# Altium PCB XL6019.PcbDoc
Units mil, origin at the board's own origin, x right, y up, seen from the top; angles counter-clockwise.
Board outline 1400 x 720 mil, 2 copper layers (Top Layer, Bottom Layer); 13 components, 5 nets, 26 pads, 99 vias.
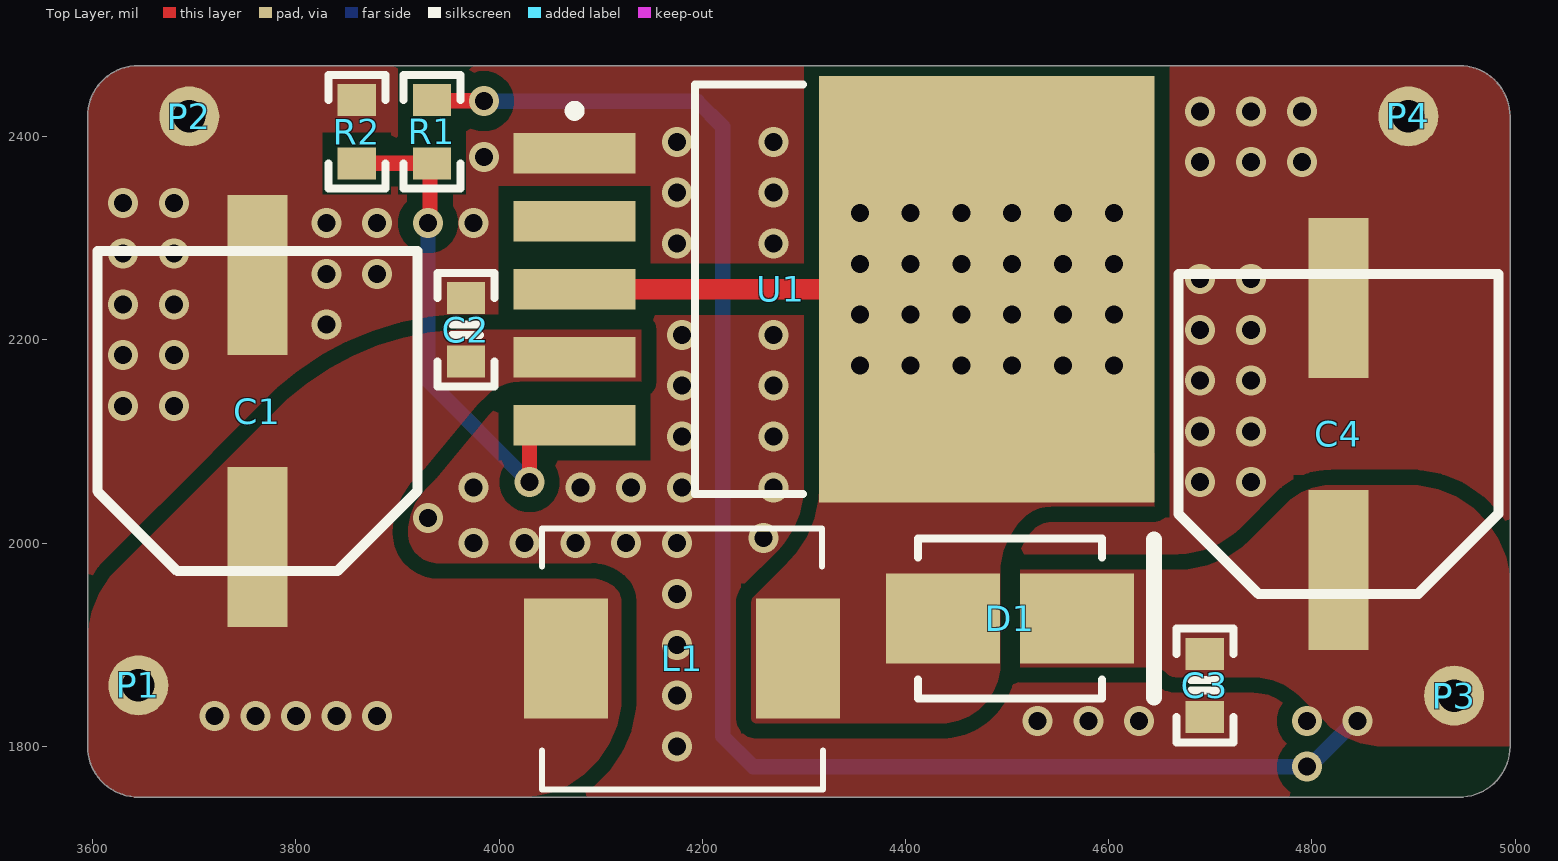
[diagram p0: Top Layer view]
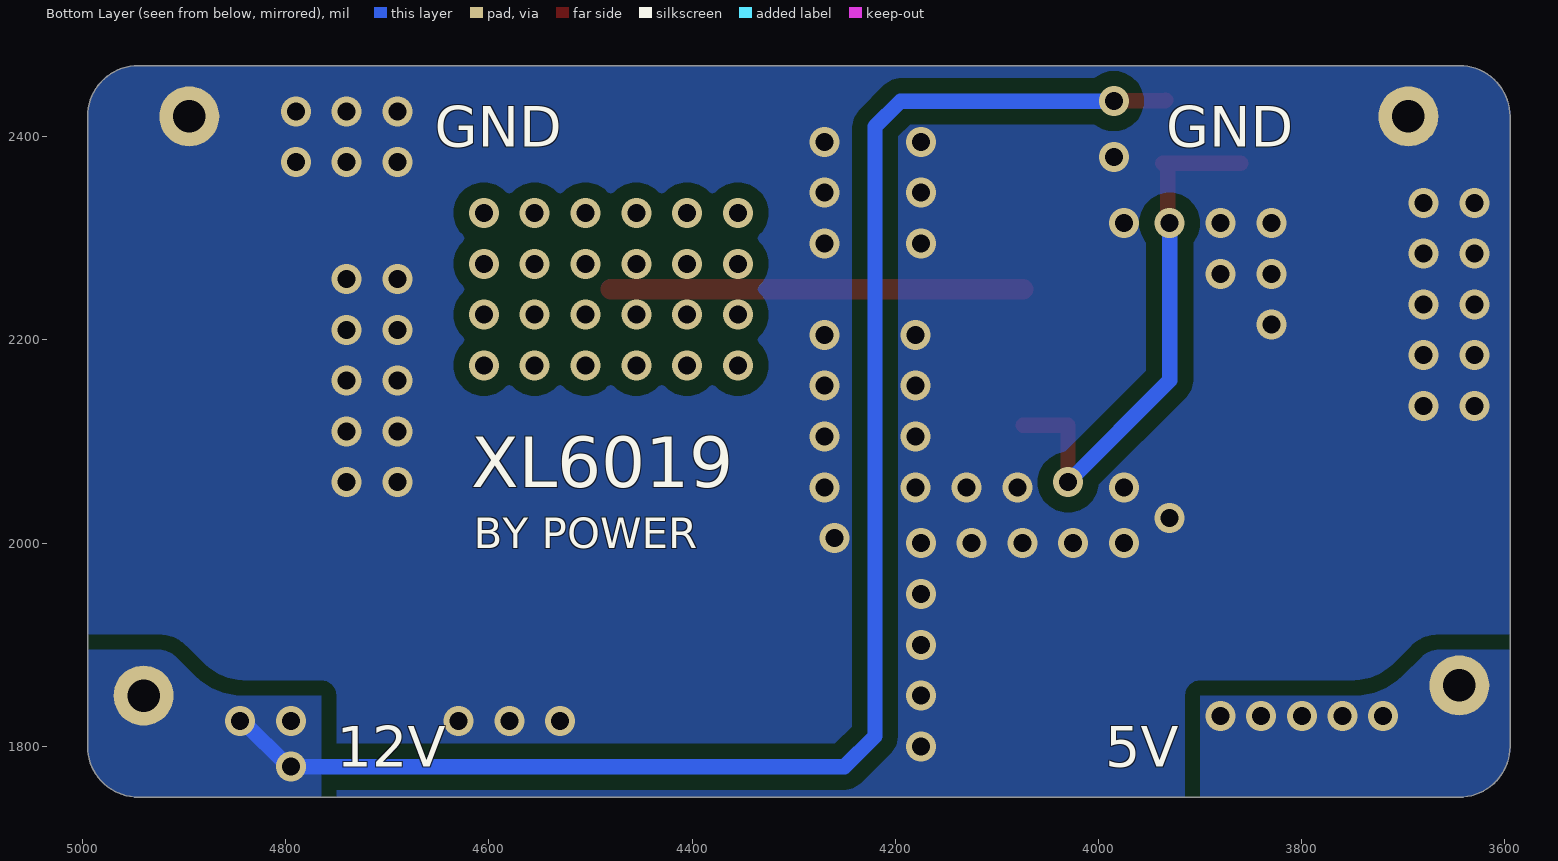
[diagram p1: Bottom Layer view, seen from below]
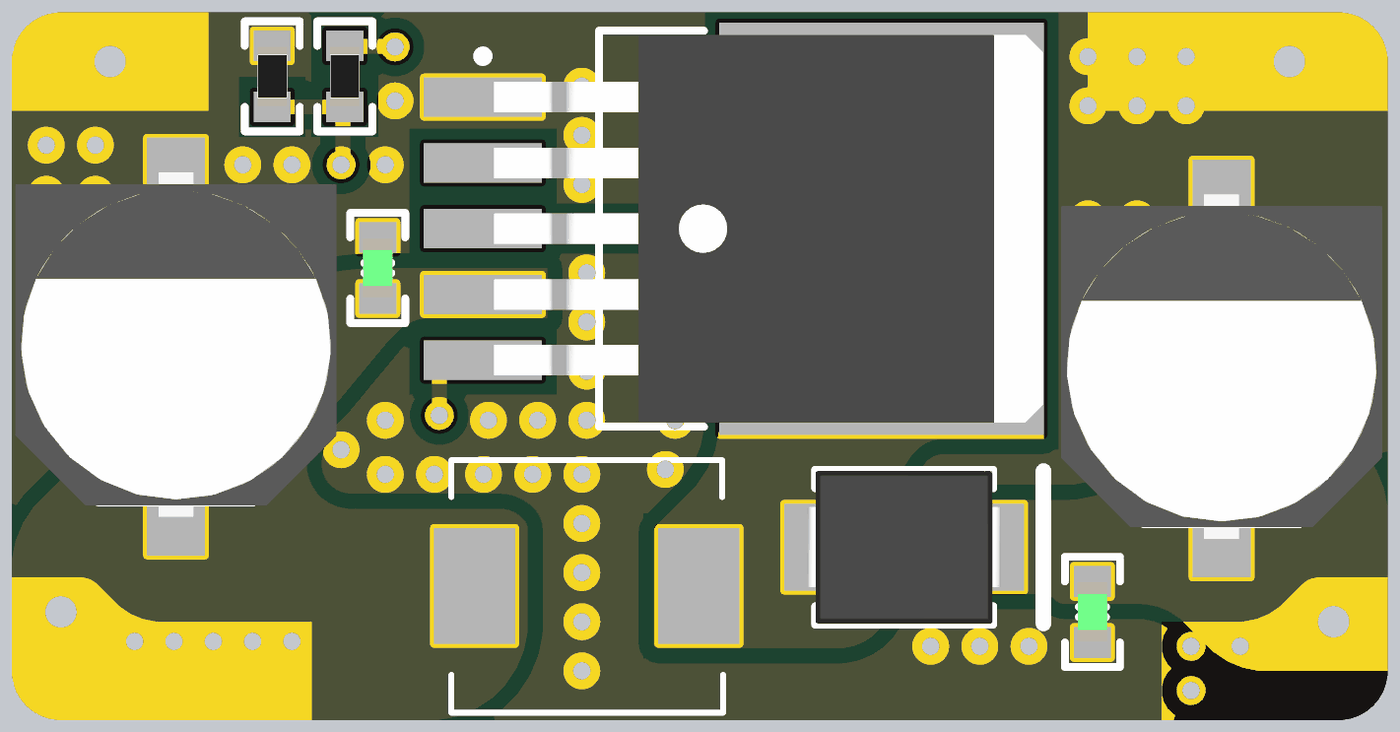
[diagram p2: 3D render of the assembled board from above, using the file's embedded part models]

## Layer stack, top to bottom
Top Solder: solder mask 0.4, Solder Resist, Dk 3.5
Top Layer: signal copper 1.4
Dielectric 1: dielectric 12.6, FR-4, Dk 4.8
Bottom Layer: signal copper 1.4
Bottom Solder: solder mask 0.4, Solder Resist, Dk 3.5

## Board outline
3595,1800 3595,2420 cw(c3645,2420) 3645,2470 4945,2470 cw(c4945,2420) 4995,2420 4995,1800 cw(c4945,1800) 4945,1750 3645,1750 cw(c3645,1800)

## Design rules (kind name [scope] priority, off if disabled: settings)
Clearance [All] p1: gap=10 ignorepadtopadclearanceinfootprint=FALSE except(0: Arc-Hole Track-Hole SMDPad-Hole THPad-Hole Via-Hole Fill-Hole Poly-Hole Region-Hole Text-Hole; 15: Arc-Fill Arc-Poly Arc-Region Track-Fill Track-Poly Track-Region SMDPad-Fill SMDPad-Poly SMDPad-Region THPad-Fill THPad-Poly THPad-Region Via-Fill Via-Poly Via-Region Fill-Fill Fill-Poly Fill-Region Poly-Poly Poly-Region Region-Region)
PlaneConnect [All] p1: planeconnectstyle=Direct reliefexpansion=20 reliefentries=4 reliefconductorwidth=10 reliefairgap=10
PolygonConnect [All] p1: connectstyle=Direct reliefconductorwidth=10 reliefentries=4 polygonreliefangle="90 Angle" airgapwidth=10
RoomDefinition XL6019 [InComponentClass('XL6019')] p1: confinementstyle=ConfineIn formatcopy=TRUE lockcomponents=FALSE outline 0,0 2000,0 2000,1000 0,1000
RoutingVias [All] p1: holewidth=17.72 width=29.53 viastyle="Through Hole" minholewidth=17.72 minwidth=29.53 maxholewidth=17.72 maxwidth=29.53
SolderMaskExpansion [All] p1: expansion=4 istentingtop=FALSE
Width [All] p1: maxlimit=100 minlimit=10 preferedwidth=15
29 further rules are at their usual default settings.

## Components (designator, comment, footprint, x,y, rotation, side; value= is the part's Value field where it differs from the comment)
C1 "220uF/25V" C_SMD-8X10 3762.05,2130 r180 top
C2 "1uF/25V" CAP-0603 3967.38,2210 r270 top
C3 "1uF/25V" CAP-0603 4694.56,1860 r90 top
C4 "220uF/25V" C_SMD-8X10 4826,2107.61 r180 top
D1 "SS54" DO-214AA/SMB 4503,1925.82 r180 top
L1 "4.7uH/5A" L-0630 4180,1886.45 r0 top
P1 "HDR1x2_2.54" HDR1X1_2.54 3645,1860 r0 top
P2 "HDR1x2_2.54" HDR1X1_2.54 3695,2420 r0 top
P3 "HDR1x2_2.54" HDR1X1_2.54 4940,1850 r0 top
P4 "HDR1x2_2.54" HDR1X1_2.54 4895,2420 r0 top
R1 "24k" R-0603 3933.88,2405 r90 top
R2 "2.74k" R-0603 3860,2405 r270 top
U1 "XL6019" TO-263-5 4480,2250 r270 top

## Footprints (in the part's own frame and the unit in brackets; to place one, negate y for a bottom-side part, rotate by r counter-clockwise, add the part's x,y. Pads: shape width x height; smd on the part's side, far side on the other; paste and mask are expansions set on the pad)
C_SMD-8X10 [mm]
  rect 1.5x4 smd: 1(0,3.4) 2(0,-3.4)
  silkscreen extent -4,-4 4,4, body extent -4.15,-4.5 4.15,4.4, height 10
CAP-0603 [mm]
  rect 0.8x0.96 smd: 1(-0.79,0) 2(0.79,0)
  silkscreen extent -1.42,-0.71 1.42,0.71, body extent -0.76,-0.39 0.76,0.39, height 0.9
DO-214AA/SMB [mm]
  rect 2.85x2.25 smd: 1(1.675,0) 2(-1.675,0)
  silkscreen extent -3.6,-2 2.3,2, body extent -2.5,-1.97 2.5,1.97, height 2.44
HDR1X1_2.54 [mm]
  round 1.5 hole 0.813: 1(0,0)
L-0630 [mm] "7*6.6*2.8MM(长*宽*高)"
  rect 2.1x3 smd: 1(-2.9,0) 2(2.9,0)
  silkscreen extent -3.5,-3.27 3.52,3.25, body extent -3.5,-3.25 3.52,3.25, height 2.8
R-0603 [mm]
  rect 0.8x0.96 smd: 1(-0.79,0) 2(0.79,0)
  silkscreen extent -1.42,-0.71 1.42,0.71, body extent -0.76,-0.38 0.76,0.38, height 0.41
TO-263-5 [mm]
  rect 1.016x3.05 smd: 1(-3.4,-10.305) 2(-1.7,-10.305) 3(0,-10.305) 4(1.7,-10.305) 5(3.4,-10.305)
  rect 10.66x8.38 smd: 6(0,0)
  silkscreen extent -5.12,-10.43 5.12,-4.59, body extent -5.01,-10.02 5.01,4.18, height 4.57

## Part data
C1 C4: library part CAP-POL, "贴片电容-有极性", Package=3528, SuppliersPartNumber=C16133, ComponentLink1Description=供应商链接, ComponentLink1URL=http://www.szlcsc.com/product/details_16815.html, Supplier=LC
C2 C3: library part CAP, "贴片电容", Package=0402, SuppliersPartNumber=C52923, ComponentLink1Description=供应商链接, ComponentLink1URL=http://www.szlcsc.com/product/details_53938.html, Supplier=LC
D1: library part DIODE, "二极管", Package=SMA(DO-214AC), SuppliersPartNumber=C22452, ComponentLink1Description=供应商链接, ComponentLink1URL=http://www.szlcsc.com/product/details_23178.html, Supplier=LC
L1: library part INDUCTOR, "电感", Package=0402, SuppliersPartNumber=C32041, ComponentLink1Description=供应商链接, ComponentLink1URL=http://www.szlcsc.com/product/details_33003.html, Supplier=LC
P1 P2 P3 P4: library part HDR1x1_2.54, "Header"
R1 R2: library part RES, "贴片电阻", Package=0805, SuppliersPartNumber=C17798, Supplier=LC
U1: "DC-DC", Manufacturer_Name="FTDI Chip", Manufacturer_Part_Number=FT232RL, RS Part Number=0406580P, Datasheet Link=http://www.ftdichip.com/Support/Documents/DataSheets/ICs/DS_FT232R.pdf, Height=2mm, RS Price/Stock=http://uk.rs-online.com/web/p/products/0406580P

## Via types
v1: diameter 29.53, hole 17.72, Top Layer to Bottom Layer, 99 vias

## Nets (pads, with @x,y where several pads share a name; then routed paths per layer and width w, separated by ;. In a path a pad name is that pad's centre, name@x,y a point inside that pad or via, vN(x,y) a via of type N, cw(c..) or ccw(c..) an arc to the next point about the centre after c; other vN are vias at no path point)
5V: C1.1 C2.2 L1.1 P1.1 U1.4
  other v1: 3720,1830 3760,1830 3800,1830 3840,1830 3880,1830
12V: C3.2 C4.1 D1.2 P3.1 R1.2 | length 1558
  Top Layer w15: R1.2 3934.44,2435.55 3984.45,2435.55 v1(3985,2435) ; v1(4795,1780) v1@4797.5,1780 ; v1@4842.5,1825 v1(4845,1825)
  Bottom Layer w15: v1(3985,2435) 4195,2435 4220,2410 4220,1810 4250,1780 v1(4795,1780) 4797.5,1780 4842.5,1825 v1(4845,1825)
  other v1: 4795,1825
GND: C1.2 C2.1 C3.1 C4.2 P2.1 P4.1 R2.1 U1.1
  other v1: 4175,1800 4530,1825 4580,1825 4630,1825 4175,1850 4175,1900 4175,1950 3975,2000 4025,2000 4075,2000 4125,2000 4175,2000 4260,2005 3930,2025 3975,2055 4080,2055 4130,2055 4180,2055 4270,2055 4690,2060 4740,2060 4180,2105 4270,2105 4690,2110 4740,2110 3630,2135 3680,2135 4180,2155 4270,2155 4690,2160 4740,2160 3630,2185 3680,2185 4180,2205 4270,2205 4690,2210 4740,2210 3830,2215 3630,2235 3680,2235 4690,2260 4740,2260 3830,2265 3880,2265 3630,2285 3680,2285 4175,2295 4270,2295 3830,2315 3880,2315 3975,2315 3630,2335 3680,2335 4175,2345 4270,2345 4690,2375 4740,2375 4790,2375 3985,2380 4175,2395 4270,2395 4690,2425 4740,2425 4790,2425
NetD1_1: D1.1 L1.2 U1.3 U1.6 | length 405.7
  Top Layer w20: U1.3 U1.6
  other v1: 4355,2175 4405,2175 4455,2175 4505,2175 4555,2175 4605,2175 4355,2225 4405,2225 4455,2225 4505,2225 4555,2225 4605,2225 4355,2275 4405,2275 4455,2275 4505,2275 4555,2275 4605,2275 4355,2325 4405,2325 4455,2325 4505,2325 4555,2325 4605,2325
NetR1_1: R1.1 R2.2 U1.5 | length 535.3
  Top Layer w15: R2.2 3936.75,2373.9 3931.94,2369.09 3931.94,2316.94 v1(3930,2315) ; v1(4030,2060) 4030,2116.14 U1.5
  Bottom Layer w15: v1(3930,2315) 3930,2160 v1(4030,2060)
pads on no net: U1.2

## Polygon pours and split planes (outlines as drawn)
GND on Top Layer "NONET_L01_P-001" (solid, remove dead copper, pour order 4): 3645,2470 ccw(c3645,2420) 3595,2420 3595,1800 ccw(c3645,1800) 3645,1750 4945,1750 ccw(c4945,1800) 4995,1800 4995,2420 ccw(c4945,2420) 4945,2470
12V on Top Layer "NONET_L01_P-001" (solid, pour order 2): 4774.81,2038.81 cw(c4818.73,1994.89) 4818.73,2057 4895,2057 cw(c4895,1957) 4995,1957 4995,1900 4995,1800 4872.36,1800 cw(c4872.36,1885.35) 4812,1825 4787.38,1849.62 ccw(c4743,1805.23) 4743,1868 4666.66,1868 cw(c4666.66,1881.66) 4657,1872 ccw(c4642.52,1857.52) 4642.51,1878 4513,1878 4513,1974 4668.58,1974 ccw(c4668.58,2074) 4739.29,2003.29
NetD1_1 on Top Layer "NONET_L01_P-001" (solid, pour order 1): 4515.63,2024.63 cw(c4543.08,1997.17) 4543.08,2036 4645,2036 4645,2089 4315,2089 4315,2053.42 cw(c4215,2053.42) 4285.71,1982.71 4251.28,1948.28 ccw(c4259.21,1940.36) 4248,1940.35 4248,1828 ccw(c4253,1828) 4253,1823 4435,1823 ccw(c4435,1881) 4493,1881 4493,1970 cw(c4570.25,1970)
5V on Top Layer "NONET_L01_P-001" (solid, pour order 0): 3595,1800 ccw(c3645,1800) 3645,1750 4020,1750 ccw(c4020,1850) 4120,1850 4120,1942.93 ccw(c4102.93,1942.93) 4115,1955 ccw(c4090.86,1930.86) 4090.86,1965 3980.43,1965 3940,1965 cw(c3940,2010) 3895,2010 cw(c3972.26,2010) 3917.63,2064.63 3926.64,2073.64 3978.63,2136.3 3988.13,2145.8 cw(c4020,2113.94) 4020,2159 4140,2159 4140,2210 3970.74,2210 ccw(c3970.73,1942.67) 3781.69,2131.69 3624.29,1974.29 ccw(c3695,1903.58) 3595,1903.58
12V on Top Solder "NONET_L01_P-001" (solid): 4995,1895 4925,1895 ccw(c4925,1870.86) 4907.93,1887.93 4889.45,1869.45 cw(c4842.5,1916.39) 4842.5,1850 4765,1850 4765,1750 4945,1750 ccw(c4945,1800) 4995,1800
5V on Top Solder "NONET_L01_P-001" (solid): 3595,1895 3665,1895 cw(c3665,1870.86) 3682.07,1887.93 3700.55,1869.45 ccw(c3747.5,1916.39) 3747.5,1850 3900,1850 3900,1750 3645,1750 cw(c3645,1800) 3595,1800
GND on Top Solder "NONET_L01_P-001" (solid): 3645,2470 ccw(c3645,2420) 3595,2420 3595,2370 3795,2370 3795,2470
GND on Top Solder "NONET_L01_P-001" (solid): 4945,2470 cw(c4945,2420) 4995,2420 4995,2370 4690,2370 4690,2470
GND on Bottom Solder "NONET_L01_P-001" (solid): 4945,2470 cw(c4945,2420) 4995,2420 4995,2370 4690,2370 4690,2470
GND on Bottom Solder "NONET_L01_P-001" (solid): 3645,2470 ccw(c3645,2420) 3595,2420 3595,2370 3795,2370 3795,2470
5V on Bottom Solder "NONET_L01_P-001" (solid): 3595,1895 3665,1895 cw(c3665,1870.86) 3682.07,1887.93 3700.55,1869.45 ccw(c3747.5,1916.39) 3747.5,1850 3900,1850 3900,1750 3645,1750 cw(c3645,1800) 3595,1800
12V on Bottom Solder "NONET_L01_P-001" (solid): 4995,1895 4925,1895 ccw(c4925,1870.86) 4907.93,1887.93 4889.45,1869.45 cw(c4842.5,1916.39) 4842.5,1850 4765,1850 4765,1750 4945,1750 ccw(c4945,1800) 4995,1800
GND on Bottom Layer "NONET_L01_P-001" (solid, remove dead copper, pour order 6): 3645,2470 ccw(c3645,2420) 3595,2420 3595,1800 ccw(c3645,1800) 3645,1750 4945,1750 ccw(c4945,1800) 4995,1800 4995,2420 ccw(c4945,2420) 4945,2470
12V on Bottom Layer "NONET_L01_P-001" (solid, pour order 5): 4995,1895 4925,1895 ccw(c4925,1870.86) 4907.93,1887.93 4889.45,1869.45 cw(c4842.5,1916.39) 4842.5,1850 4765,1850 4765,1750 4945,1750 ccw(c4945,1800) 4995,1800
5V on Bottom Layer "NONET_L01_P-001" (solid, pour order 3): 3595,1895 3665,1895 cw(c3665,1870.86) 3682.07,1887.93 3700.55,1869.45 ccw(c3747.5,1916.39) 3747.5,1850 3900,1850 3900,1750 3645,1750 cw(c3645,1800) 3595,1800

## Silkscreen, mask and mechanical layers (free items; w line width, h text height)
Bottom Overlay:
  text "GND" at 3933.32,2390.01 h40
  text "GND" at 4653.32,2390.01 h40
  text "XL6019" at 4617.46,2055.01 h50
  text "BY POWER" at 4614.96,1995 h30
  text "5V" at 3993.32,1780.01 h40
  text "12V" at 4749.98,1780.01 h40
Mechanical 1:
  lines w10: 3595,1800 ccw(c3645,1800) 3645,1750 4050,1750 4945,1750 ccw(c4945,1800) 4995,1800 4995,2420 ccw(c4945,2420) 4945,2470 3645,2470 ccw(c3645,2420) 3595,2420 3595,1800